# Altium PCB PCB1.PcbDoc
Units mm, origin at the board's own origin, x right, y up, seen from the top; angles counter-clockwise.
Board outline 44.5 x 44.5 mm, 2 copper layers (Top Layer, Bottom Layer); 17 components, 18 nets, 86 pads, 20 vias.
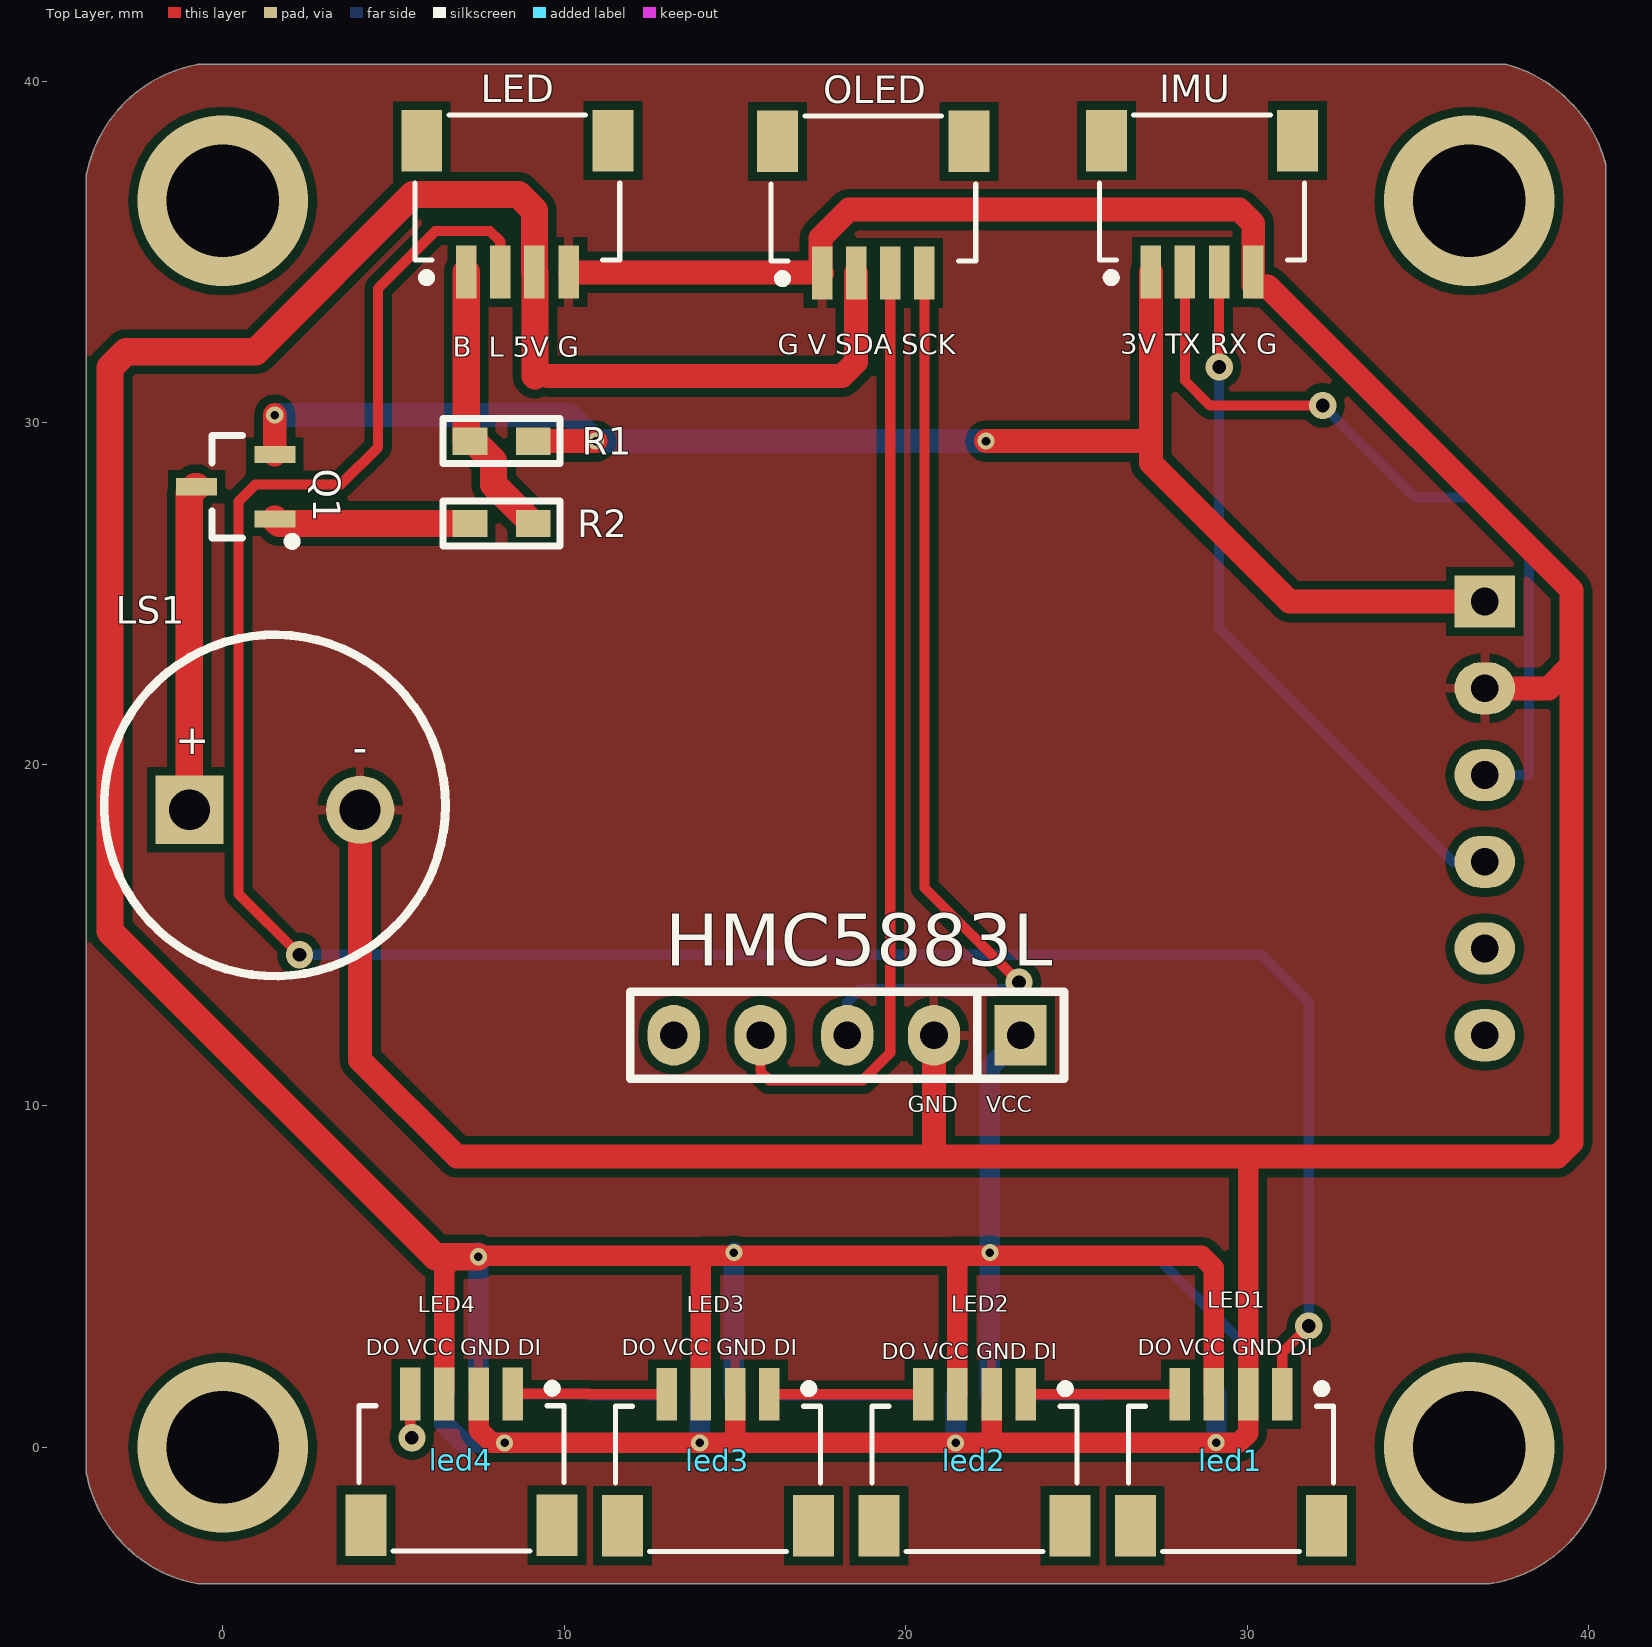
[diagram p0: Top Layer view]
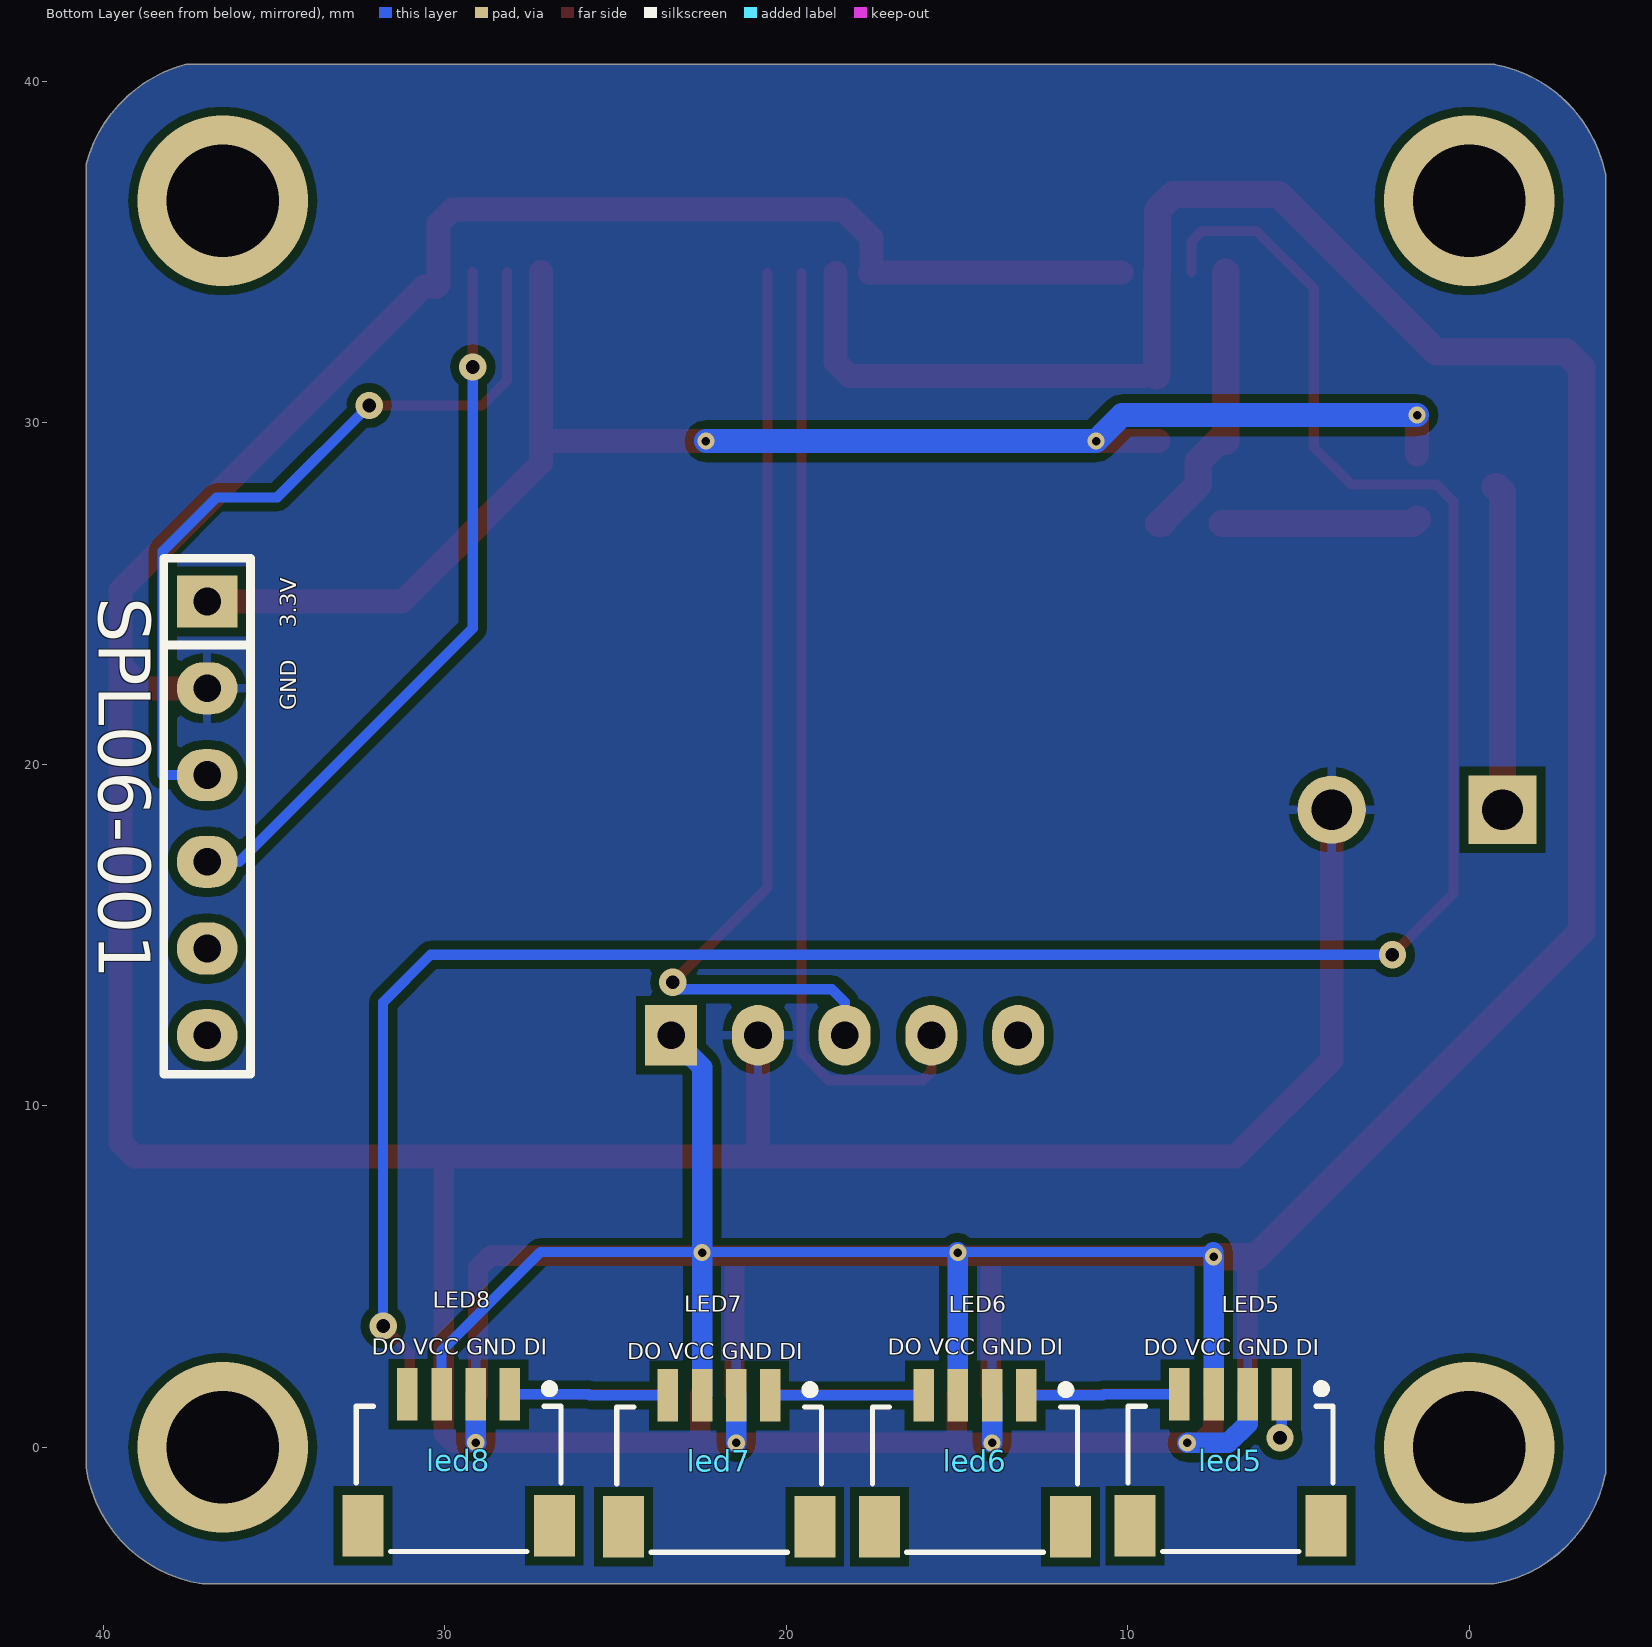
[diagram p1: Bottom Layer view, seen from below]
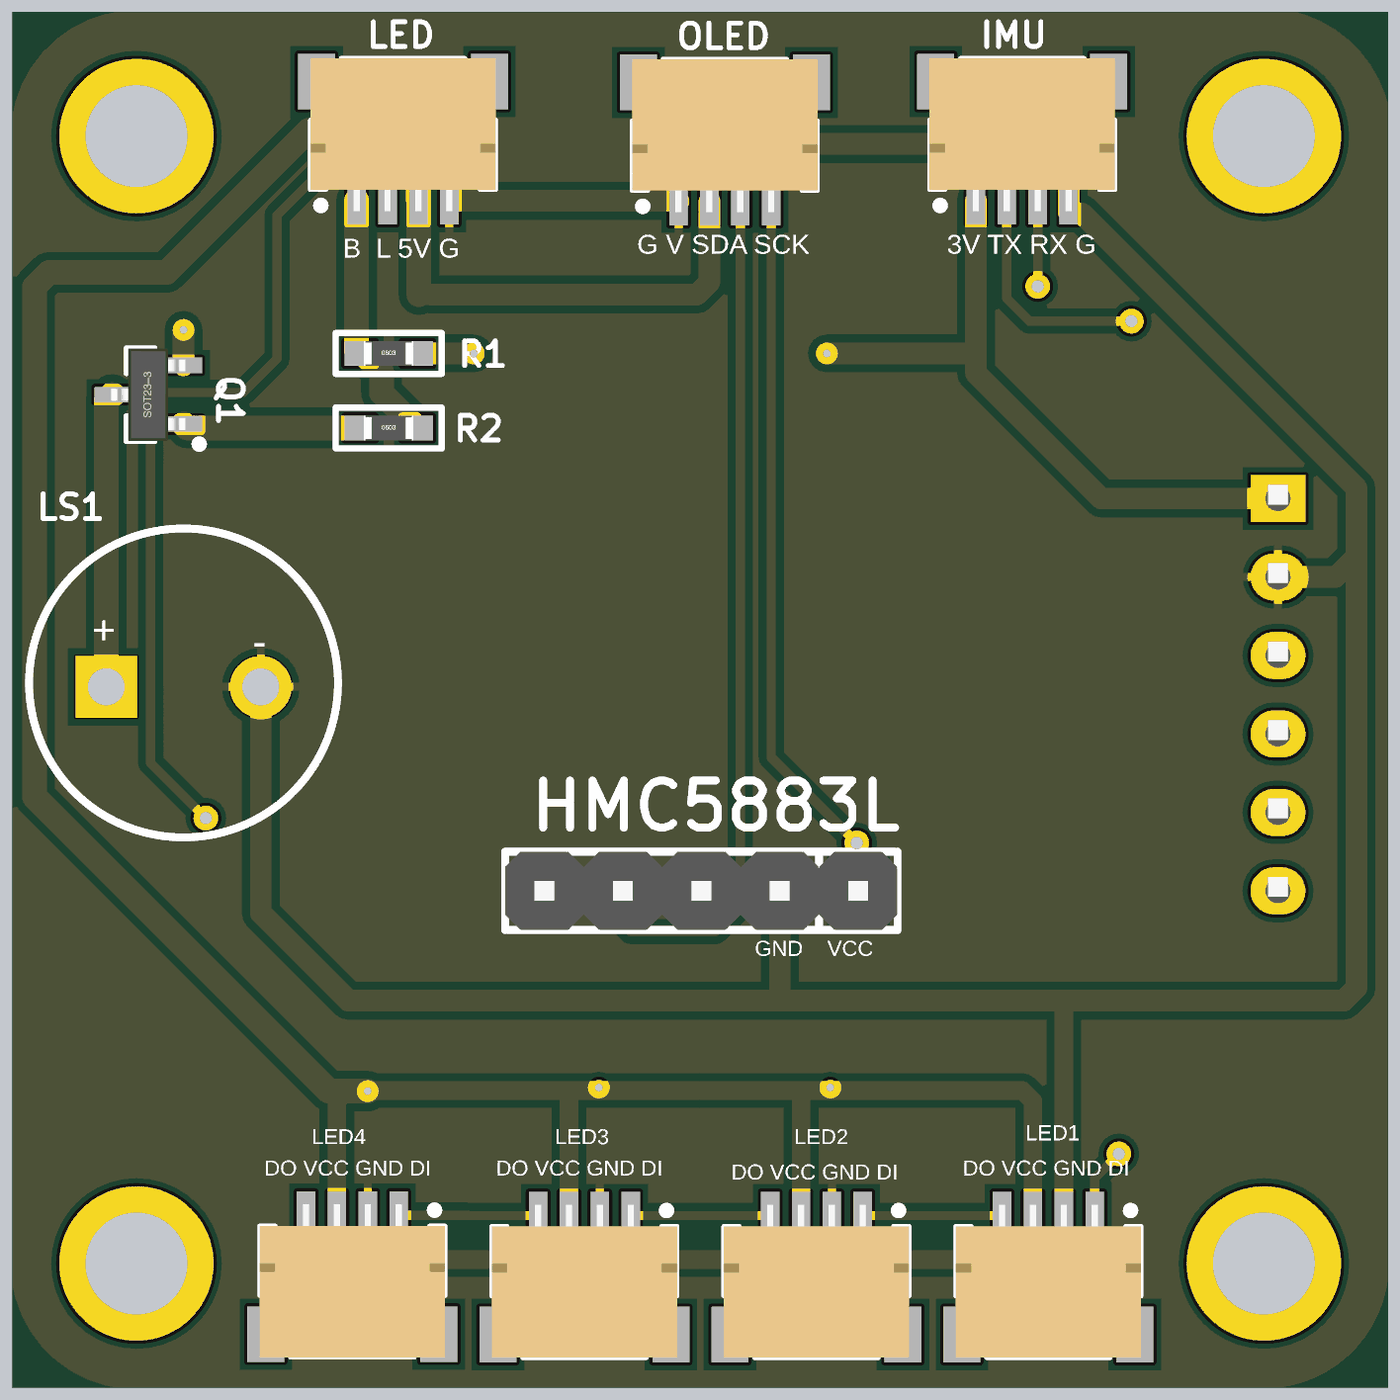
[diagram p2: 3D render of the assembled board from above, using the file's embedded part models]
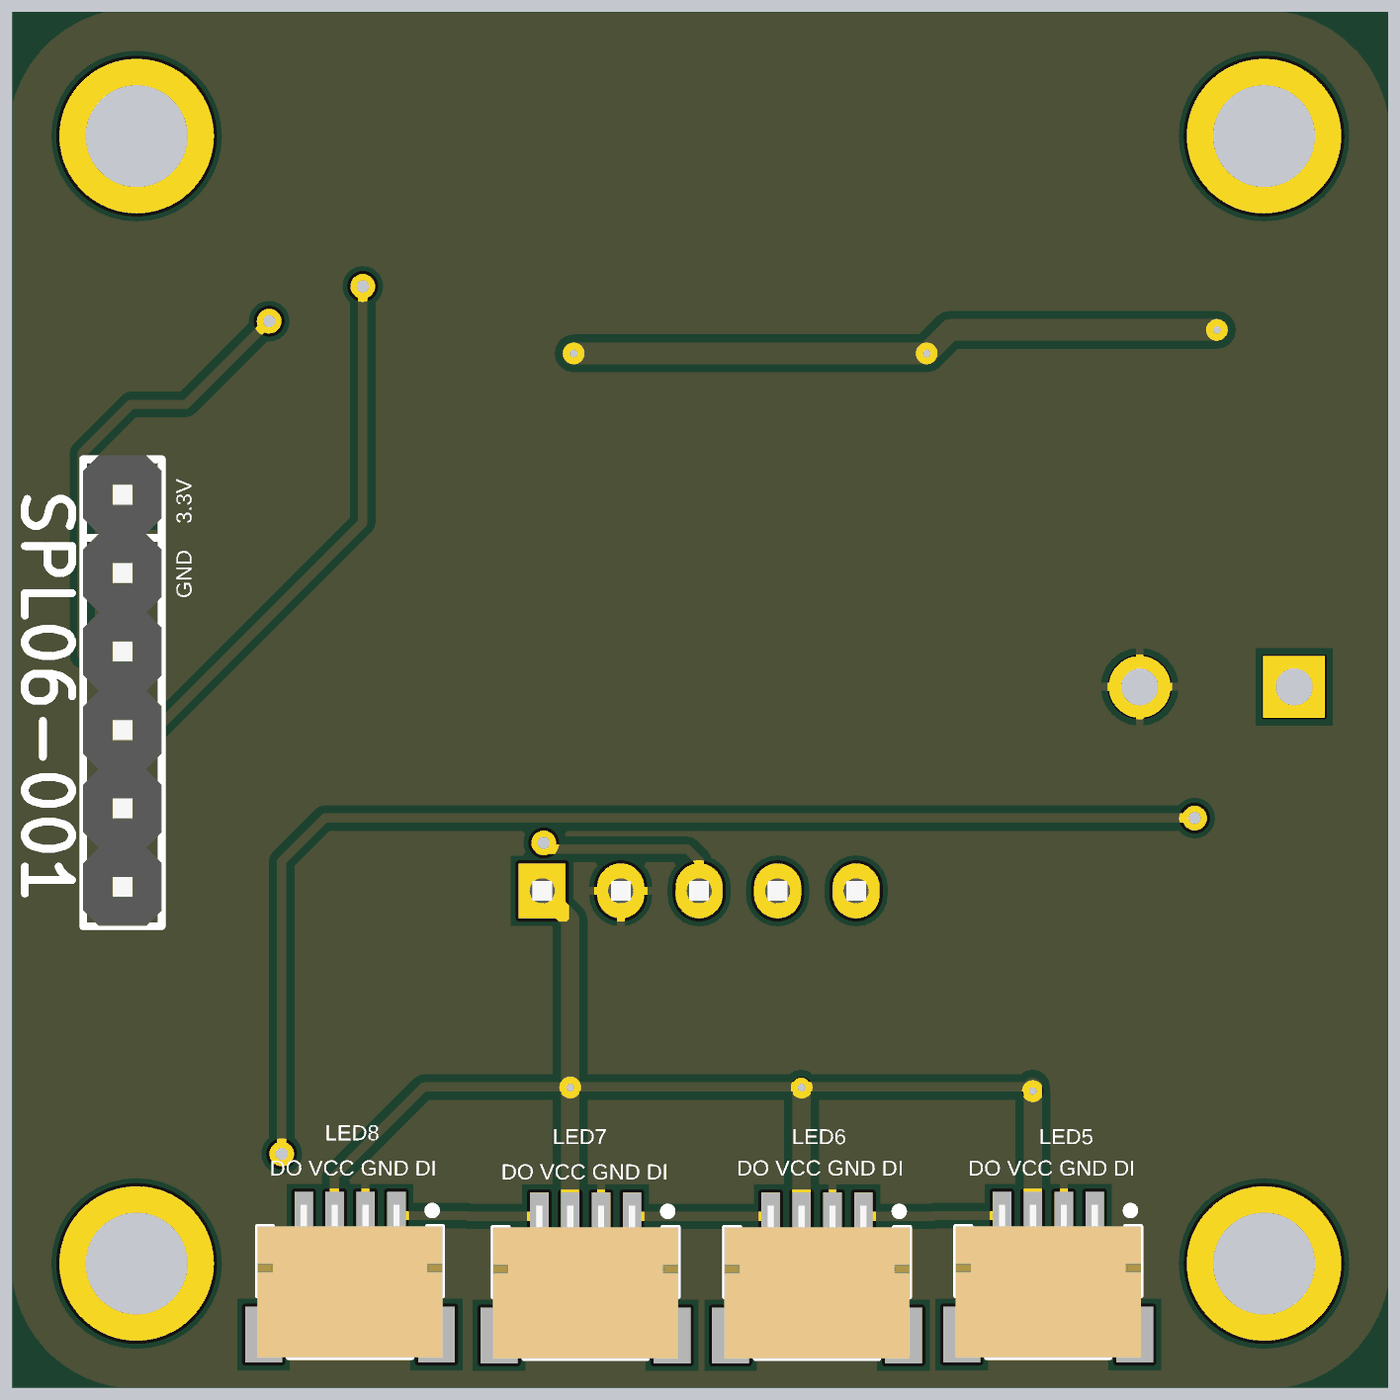
[diagram p3: 3D render of the assembled board from below, using the file's embedded part models]

## Layer stack, top to bottom
Top Solder: solder mask 0.0102, Solder Resist, Dk 3.5
Top Layer: signal copper 0.0356
Dielectric 1: dielectric 0.32, FR-4, Dk 4.8
Bottom Layer: signal copper 0.0356
Bottom Solder: solder mask 0.0102, Solder Resist, Dk 3.5

## Board outline
-4,-0.797 -4,37.275 -3.981,37.321 cw(c0,36.5) -0.7,40.504 -0.749,40.5 37.582,40.5 cw(c36.5,36.5) 40.5,37.582 40.5,-0.602 cw(c36.5,0) 37.102,-4 -0.73,-4 cw(c0,0)

## Design rules (kind name [scope] priority, off if disabled: settings)
Clearance [All] p1: gap=0.254 ignorepadtopadclearanceinfootprint=TRUE except(0: Arc-Hole Track-Hole SMDPad-Hole THPad-Hole Via-Hole Fill-Hole Poly-Hole Region-Hole Text-Hole)
PolygonConnect [All] p1: connectstyle=Relief reliefconductorwidth=0.254 reliefentries=4 polygonreliefangle="90 Angle" airgapwidth=0.254
RoutingVias [All] p1: holewidth=0.4 width=0.8 viastyle="Through Hole" minholewidth=0.3 minwidth=0.8 maxholewidth=0.711 maxwidth=1.27
SolderMaskExpansion [All] p1: expansion=0.102 istentingtop=FALSE
Width [All] p1: maxlimit=2 minlimit=0.2 preferedwidth=0.3
30 further rules are at their usual default settings.

## Components (designator, comment, footprint, x,y, rotation, side; value= is the part's Value field where it differs from the comment)
HMC5883L "Pin HDR1X5" "Pin HDR1X5/2.54mm-S" 23.368,12.065 r270 top
IMU "Female HDR1X4" "SH1.0 S-W-4P" 28.678,39.017 r180 top
LED "Female HDR1X4" "SH1.0 S-W-4P" 8.628,39.017 r180 top
led1 "Pin HDR1X4" "SH1.0 S-W-4P" 29.525,-3.048 r0 top
led2 "Pin HDR1X4" "SH1.0 S-W-4P" 22.014,-3.048 r0 top
led3 "Pin HDR1X4" "SH1.0 S-W-4P" 14.502,-3.048 r0 top
led4 "Pin HDR1X4" "SH1.0 S-W-4P" 6.991,-3.036 r0 top
led5 "Pin HDR1X4" "SH1.0 S-W-4P" 6.985,-3.048 r180 bottom
led6 "Pin HDR1X4" "SH1.0 S-W-4P" 14.47,-3.076 r180 bottom
led7 "Pin HDR1X4" "SH1.0 S-W-4P" 21.963,-3.076 r180 bottom
led8 "Pin HDR1X4" "SH1.0 S-W-4P" 29.591,-3.048 r180 bottom
LS1 "Buzzer" Buzzer 1.524,18.669 r0 top
OLED "Female HDR1X4" "SH1.0 S-W-4P" 19.05,38.989 r180 top
Q1 "SS8550" SOT23-3N 0.381,28.128 r90 top
R1 "10k" "R 0603_M" 8.166,29.464 r0 top
R2 "1k" "R 0603_M" 8.166,27.051 r0 top
SPL06-001 "Pin HDR1X6" "Pin HDR1X6/2.54mm-S" 36.957,24.765 r180 bottom

## Footprints (in the part's own frame and the unit in brackets; to place one, negate y for a bottom-side part, rotate by r counter-clockwise, add the part's x,y. Pads: shape width x height; smd on the part's side, far side on the other; paste and mask are expansions set on the pad)
Buzzer [mm]
  rect 2x2 hole 1.199 paste+0 mask+0.051: 1(-2.5,0)
  round 2 hole 1.199 paste+0 mask+0.051: 2(2.5,0)
  silkscreen extent -5,-4.87 5,5.13
"Pin HDR1X5/2.54mm-S" [mil]
  rect 70x60 hole 32: 1(0,0)
  oval 70x60 hole 32: 2(0,-100) 3(0,-200) 4(0,-300) 5(0,-400)
  silkscreen extent -50,-450 50,50, body extent -50,-450 50,50, height 336
"Pin HDR1X6/2.54mm-S" [mil]
  rect 70x60 hole 32: 1(0,0)
  oval 70x60 hole 32: 2(0,-100) 3(0,-200) 4(0,-300) 5(0,-400) 6(0,-500)
  silkscreen extent -50,-545 50,50, body extent -50,-545 50,55, height 336
"R 0603_M" [mil] "1/10W贴片电阻"
  rect 40x31.5 smd: 1(-36.5,0) 2(36.5,0)
  silkscreen extent -68,-26 67,26, body extent -31,-16 31,16, height 16
"SH1.0 S-W-4P" [mm]
  rect 1.2x1.8 smd: 0(-2.8,0.75) 0(2.8,0.75)
  rect 0.6x1.55 smd: 1(1.5,4.6) 2(0.5,4.6) 3(-0.5,4.6) 4(-1.5,4.6)
  silkscreen extent -3,0 3,4.89, body extent -3,0 3,4.95, height 2.92
SOT23-3N [mm] "3x1.3x1mm(长宽高)"
  rect 0.5x1.2 smd: 1(-0.95,-1.143) 2(0.95,-1.143) 3(0,1.143)
  silkscreen extent -1.72,-1.78 1.5,0.7, body extent -1.5,-1.2 1.5,1.2, height 1.05

## Part data
LS1: "Magnetic Transducer Buzzer", ComponentLink1Description="Manufacturer Link", ComponentLink1URL=http://www.megastar.com/linecard/buzzmode/index.php, DatasheetVersion=17-Dec-2003, LatestRevisionDate=17-Dec-2003, LatestRevisionNote="Schematic revised, PCB Footprint replaced.", PackageDescription="Magnetic Transducer Buzzer", PackageReference=ABSM-1574, Published=24-Mar-1999, Publisher="Altium Limited"
Q1: library part 9012-SMD, "低频放大-PNP型", BOM名称=低频放大-PNP型, 版权归属=源创客, 属性="50V 0.5A 0.625W", 学习资源=www.ooocke.com
R1 R2: library part R, "贴片电阻", BOM名称=贴片电阻, 版权归属=源创客, 学习资源=www.ooocke.com

## Via types
v1: diameter 0.5/0.5 (per signal layer), hole 0.25, Top Layer to Bottom Layer, 10 vias
v2: diameter 0.8, hole 0.4, Top Layer to Bottom Layer, 6 vias
v3: diameter 5, hole 3.3, Top Layer to Bottom Layer, 4 vias

## Nets (pads, with @x,y where several pads share a name; then routed paths per layer and width w, separated by ;. In a path a pad name is that pad's centre, name@x,y a point inside that pad or via, vN(x,y) a via of type N, cw(c..) or ccw(c..) an arc to the next point about the centre after c; other vN are vias at no path point)
+3.3: IMU.1 Q1.2 R1.2 SPL06-001.1 | length 46
  Top Layer w0.7: Q1.2 v1(1.524,30.226) ; R1.2 v1(10.922,29.464) ; v1(22.352,29.464) 27.178,29.464 ; IMU.1 27.178,29.464 ; SPL06-001.1 31.242,24.765 27.178,28.829 27.178,29.464
  Bottom Layer w0.7: v1(1.524,30.226) 10.16,30.226 v1(10.922,29.464) v1(22.352,29.464)
BUZZER: LED.1 R1.1 R2.2 | length 8.4
  Top Layer w0.8: LED.1 7.128,29.467 7.131,29.464 R1.1 7.347,29.464 7.931,28.88 7.931,28.192 8.985,27.138 8.985,27.051 R2.2
GND: HMC5883L.2 IMU.4 led1.2 led2.2 led3.2 led4.2 led5.2 led6.2 led7.2 led8.2 LED.4 LS1.2 OLED.1 SPL06-001.2 | length 145.2
  Top Layer w0.3: LED.4 10.178,34.417 LED.4@10.178,34.403
  Top Layer w0.6: led4.2 7.491,0.51 7.874,0.127 v1(8.255,0.127) v1(13.97,0.127) 14.986,0.127 ; led3.2 15.002,0.143 14.986,0.127 ; led2.2 22.513,0.22 22.606,0.127 ; 30.226,8.509 30.025,8.308 led1.2 30.025,0.404 29.748,0.127 22.606,0.127 ; 14.986,0.127 v1(21.463,0.127) 22.606,0.127
  Top Layer w0.7: LS1.2 4.024,11.343 6.858,8.509 20.828,8.509 ; LED.4@10.178,34.403 OLED.1@17.536,34.403 ; OLED.1 OLED.1@17.536,34.403 ; HMC5883L.2 20.828,8.509 ; SPL06-001.2 38.821,22.225 39.497,22.901 ; OLED.1@17.536,34.403 17.5,34.439 17.5,35.407 18.336,36.243 29.768,36.243 30.178,35.833 IMU.4 30.178,34.042 30.228,33.992 30.603,33.992 39.497,25.098 39.497,22.901 ; 20.828,8.509 30.226,8.509 39.087,8.509 39.497,8.919 39.497,22.901
  Bottom Layer w0.6: led5.2 6.485,0.694 7.052,0.127 v1(8.255,0.127) ; v1(13.97,0.127) led6.2 ; v1(21.463,0.127) led7.2 ; v1@29.083,0.127 v1(29.091,0.135) led8.2
NetLED1_1: led1.1 LED.2 | length 70.6
  Top Layer w0.3: v2(2.247,14.421) 0.46,16.208 0.46,27.689 0.968,28.197 3.457,28.197 4.549,29.289 4.549,33.937 6.226,35.614 7.826,35.614 8.128,35.312 LED.2 ; led1.1 31.025,2.771 v2(31.804,3.55)
  Bottom Layer w0.3: v2(2.247,14.421) 30.415,14.421 31.804,13.033 v2(31.804,3.55)
Netled1_4: led1.4 led2.1 | length 4.5
  Top Layer w0.3: led2.1 led1.4
Netled2_4: led2.4 led3.1 | length 4.5
  Top Layer w0.3: led3.1 led2.4
Netled3_4: led3.4 led4.1 | length 4.5
  Top Layer w0.3: led4.1 10.722,1.564 10.734,1.552 led3.4
Netled4_4: led4.4 led5.1 | length 2.6
  Top Layer w0.3: led4.4 5.491,0.331 v2(5.54,0.282)
  Bottom Layer w0.3: led5.1 5.485,0.337 v2(5.54,0.282)
Netled5_4: led5.4 led6.1 | length 4.5
  Bottom Layer w0.3: led5.4 10.696,1.552 10.724,1.524 led6.1
Netled6_4: led6.4 led7.1 | length 4.5
  Bottom Layer w0.3: led6.4 led7.1
Netled7_4: led7.4 led8.1 | length 4.6
  Bottom Layer w0.3: led7.4 25.758,1.524 25.786,1.552 led8.1
NetLS1_1: LS1.1 Q1.3 | length 9.6
  Top Layer w0.8: LS1.1 -0.976,27.964 -0.812,28.128 Q1.3
NetQ1_1: Q1.1 R2.1 | length 5.8
  Top Layer w0.8: Q1.1 1.651,27.051 R2.1
RX1: IMU.3 SPL06-001.4 | length 21
  Top Layer w0.3: v2(29.178,31.635) IMU.3
  Bottom Layer w0.3: v2(29.178,31.635) 29.178,23.987 36.02,17.145 SPL06-001.4
SCK: HMC5883L.3 OLED.4 | length 28.2
  Top Layer w0.3: OLED.4 20.55,16.387 v2(23.32,13.617)
  Bottom Layer w0.3: HMC5883L.3 18.288,13.033 18.669,13.414 23.117,13.414 v2(23.32,13.617)
SDA: HMC5883L.4 OLED.3 | length 28.1
  Top Layer w0.3: HMC5883L.4 15.748,11.001 16.002,10.747 18.748,10.747 19.55,11.549 OLED.3
TX1: IMU.2 SPL06-001.3 | length 23.2
  Top Layer w0.3: IMU.2 28.178,31.238 28.908,30.508 v2(32.21,30.508)
  Bottom Layer w0.3: v2(32.21,30.508) 34.902,27.816 36.68,27.816 38.255,26.241 38.255,19.685 SPL06-001.3
VCC: HMC5883L.1 led1.3 led2.3 led3.3 led4.3 led5.3 led6.3 led7.3 led8.3 LED.3 OLED.2 | length 144.7
  Top Layer w0.6: led4.3 6.491,5.251 6.821,5.58 6.843,5.602 ; v1@7.559,5.602 13.97,5.602 ; led3.3 14.002,5.57 13.97,5.602 ; led2.3 21.514,5.41 21.322,5.602 ; led1.3 29.025,5.251 28.673,5.602 22.463,5.602 21.322,5.602 ; 13.97,5.602 14.97,5.602 21.322,5.602
  Top Layer w0.7: 9.519,31.369 18.14,31.369 18.55,31.779 OLED.2
  Top Layer w0.8: v1(7.485,5.58) 6.821,5.58 6.491,5.58 6.231,5.58 -3.302,15.113 -3.302,31.616 -2.833,32.085 0.97,32.085 5.572,36.687 8.659,36.687 9.128,36.218 LED.3 9.144,34.401 9.144,31.369
  Bottom Layer w0.3: v1@7.493,5.715 14.986,5.715 27.198,5.715 30.091,2.822 led8.3
  Bottom Layer w0.6: led5.3 v1(7.485,5.58) 7.493,5.588 v1@7.493,5.715 ; led6.3 v1(14.97,5.699) v1@14.986,5.715 ; led7.3 v1(22.463,5.699) 22.463,11.125 22.814,11.476 22.906,11.476 23.368,11.938 HMC5883L.1
pads on no net: HMC5883L.5 IMU.0 led1.0 led2.0 led3.0 led4.0 led5.0 led6.0 led7.0 led8.0 led8.4 LED.0 OLED.0 SPL06-001.5 SPL06-001.6
copper on no net:
  other v3: 0,0 36.5,0 0,36.5 36.5,36.5

## Polygon pours and split planes (outlines as drawn)
GND on Top Layer "Top Layer-No Net" (solid, pour order 0): -4,-0.797 -4,37.275 -3.981,37.321 cw(c0,36.5) -0.7,40.504 -0.749,40.5 37.582,40.5 cw(c36.5,36.5) 40.5,37.582 40.5,-0.602 cw(c36.5,0) 37.102,-4 -0.73,-4 cw(c0,0)
GND on Bottom Layer "Top Layer-No Net" (solid, pour order 1): -4,-0.797 -4,37.275 -3.981,37.321 cw(c0,36.5) -0.7,40.504 -0.749,40.5 37.582,40.5 cw(c36.5,36.5) 40.5,37.582 40.5,-0.602 cw(c36.5,0) 37.102,-4 -0.73,-4 cw(c0,0)

## Silkscreen, mask and mechanical layers (free items; w line width, h text height)
Top Overlay:
  text "G V SDA SCK" at 16.256,31.822 h1
  text "3V TX RX G" at 26.289,31.83 h1
  text "B  L 5V G" at 6.731,31.75 h1
  text "+" at -1.397,19.995 h1.5
  text "-" at 3.81,19.785 h1.5
  text "GND    VCC" at 20.066,9.652 h0.8
  text "LED1" at 28.829,3.931 h0.8
  text "LED2" at 21.336,3.804 h0.8
  text "LED4" at 5.715,3.795 h0.8
  text "LED3" at 13.589,3.795 h0.8
  text "DO VCC GND DI" at 4.191,2.54 h0.8
  text "DO VCC GND DI" at 11.684,2.54 h0.8
  text "DO VCC GND DI" at 26.797,2.54 h0.8
  text "DO VCC GND DI" at 19.304,2.413 h0.8
Bottom Overlay:
  text "3.3V" at 34.186,24.003 h0.8 r270
  text "GND" at 34.186,21.59 h0.8 r270
  text "LED8" at 30.353,3.922 h0.8
  text "LED7" at 22.987,3.807 h0.8
  text "LED5" at 7.239,3.798 h0.8
  text "LED6" at 15.24,3.795 h0.8
  text "DO VCC GND DI" at 9.525,2.54 h0.8
  text "DO VCC GND DI" at 17.027,2.543 h0.8
  text "DO VCC GND DI" at 32.14,2.543 h0.8
  text "DO VCC GND DI" at 24.647,2.416 h0.8
Mechanical 1:
  lines w0.254: -4,-0.797 -4,37.275 ; -3.987,-0.797 ccw(c0,0) -0.73,-4 37.102,-4 ccw(c36.5,0) 40.5,-0.602 40.5,37.582 ccw(c36.5,36.5) 37.582,40.5 -0.749,40.5
Mechanical 13:
  lines w0.254: -3.981,37.321 cw(c0,36.5) -0.7,40.504